# Altium PCB LatchSR-D.PcbDoc
Units mm, origin at the board's own origin, x right, y up, seen from the top; angles counter-clockwise.
Board outline 100 x 50 mm, 2 copper layers (Top Layer, Bottom Layer); 13 components, 17 nets, 72 pads, 0 vias.
Unrouted connection lines stored in the file: 39.
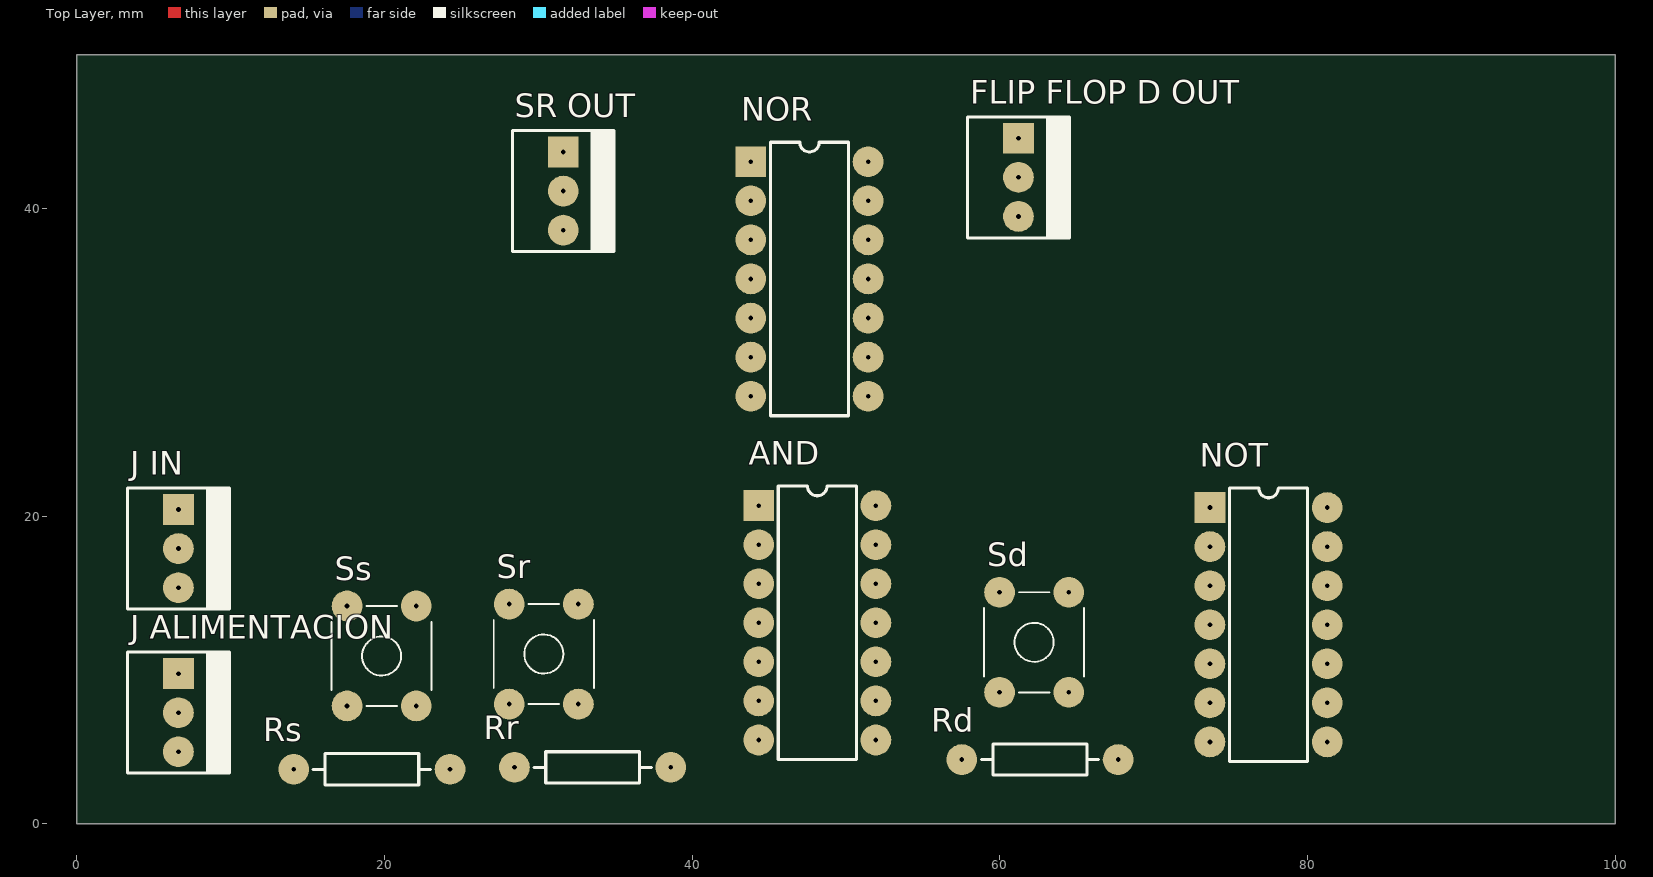
[diagram p0: Top Layer view]
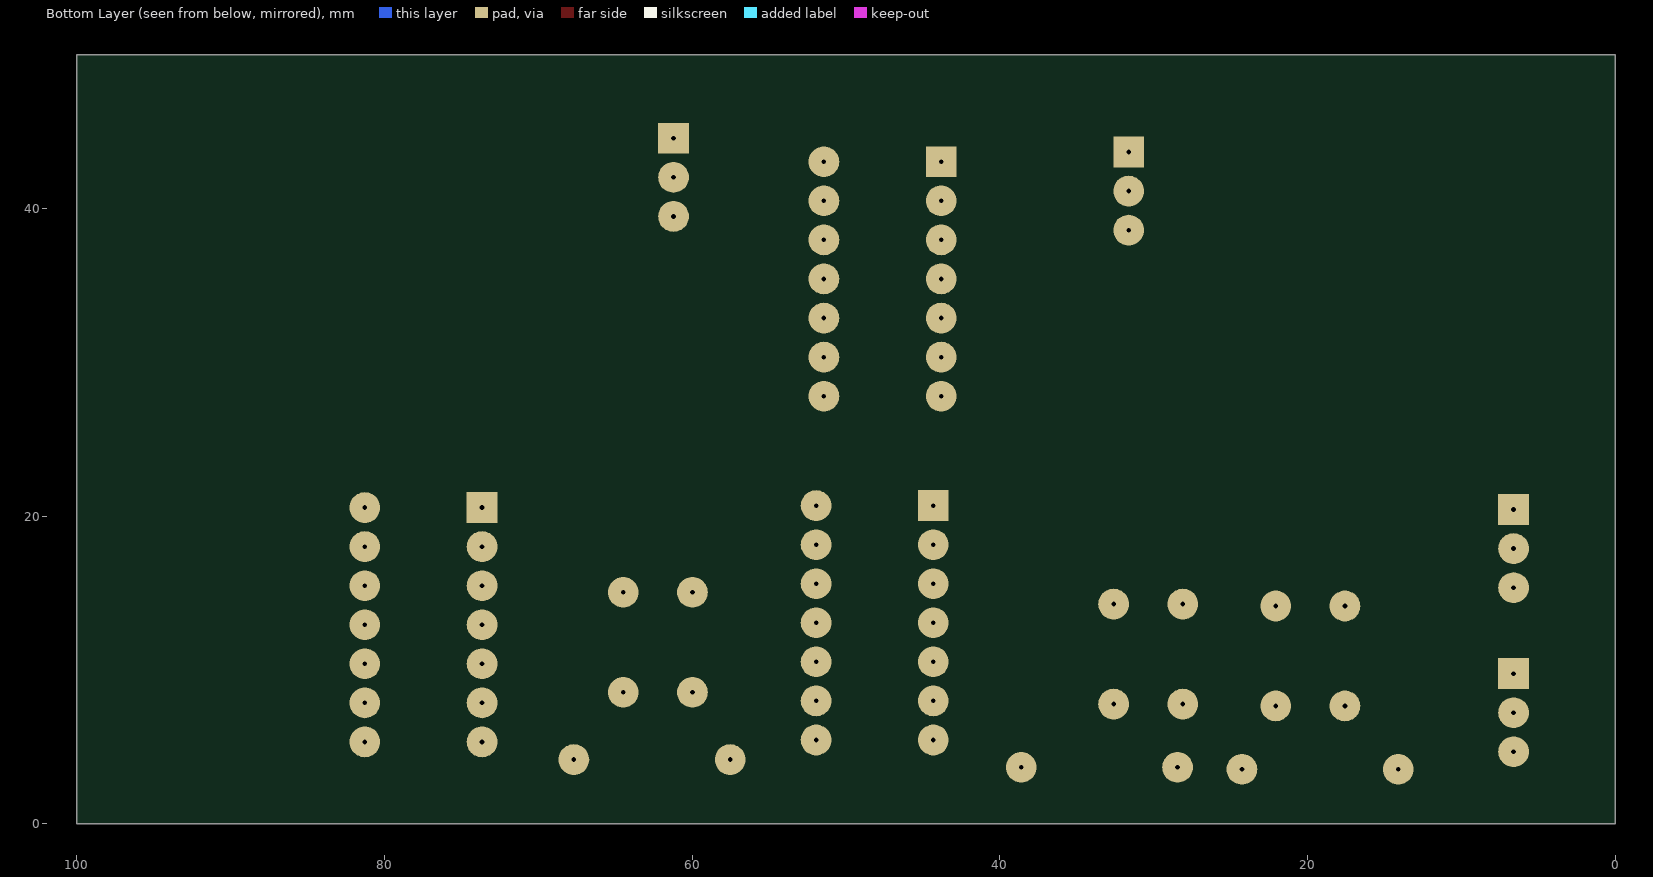
[diagram p1: Bottom Layer view, seen from below]

## Layer stack, top to bottom
Top Solder: solder mask 0.0102, Solder Resist, Dk 3.5
Top Layer: signal copper 0.0356
Dielectric 1: dielectric 0.32, FR-4, Dk 4.8
Bottom Layer: signal copper 0.0356
Bottom Solder: solder mask 0.0102, Solder Resist, Dk 3.5

## Board outline
0,0 100,0 100,50 0,50

## Design rules (kind name [scope] priority, off if disabled: settings)
Clearance [All] p1: gap=0.254 ignorepadtopadclearanceinfootprint=FALSE except(0: Arc-Hole Track-Hole SMDPad-Hole THPad-Hole Via-Hole Fill-Hole Poly-Hole Region-Hole Text-Hole)
PolygonConnect [All] p1: connectstyle=Relief reliefconductorwidth=0.254 reliefentries=4 polygonreliefangle="90 Angle" airgapwidth=0.254
RoutingVias [All] p1: holewidth=0.711 width=1.27 viastyle="Through Hole" minholewidth=0.711 minwidth=1.27 maxholewidth=0.711 maxwidth=1.27
SolderMaskExpansion [All] p1: expansion=0.102
Width [All] p1: maxlimit=0.254 minlimit=0.254 preferedwidth=0.254
30 further rules are at their usual default settings.

## Components (designator, comment, footprint, x,y, rotation, side; value= is the part's Value field where it differs from the comment)
AND "HC08" DIP14 44.323,20.701 r0 top
"FLIP FLOP D OUT" "MOLEX3" MOLEX3 61.214,44.577 r270 top
"J ALIMENTACION" "MOLEX3" MOLEX3 6.604,9.779 r270 top
"J IN" "MOLEX3" MOLEX3 6.604,20.447 r270 top
NOR "HC02" DIP14 43.815,43.053 r0 top
NOT "HC04" DIP14 73.66,20.574 r0 top
Rd "RES" RES400 57.531,4.191 r0 top
Rr "RES" RES400 28.448,3.683 r0 top
Rs "RES" RES400 14.097,3.556 r0 top
Sd "TACT SWITCH" TACTSWITCH 62.23,11.811 r0 top
Sr "TACT SWITCH" TACTSWITCH 30.353,11.049 r0 top
"SR OUT" "MOLEX3" MOLEX3 31.623,43.688 r270 top
Ss "TACT SWITCH" TACTSWITCH 19.812,10.922 r0 top

## Footprints (in the part's own frame and the unit in brackets; to place one, negate y for a bottom-side part, rotate by r counter-clockwise, add the part's x,y. Pads: shape width x height; smd on the part's side, far side on the other; paste and mask are expansions set on the pad)
DIP14 [mm]
  rect 2x2 hole 0.3: 1(0,0)
  round 2 hole 0.3: 2(0,-2.54) 3(0,-5.08) 4(0,-7.62) 5(0,-10.16) 6(0,-12.7) 7(0,-15.24) 8(7.62,-15.24) 9(7.62,-12.7) 10(7.62,-10.16) 11(7.62,-7.62) 12(7.62,-5.08) 13(7.62,-2.54) 14(7.62,0)
  silkscreen extent 1.27,-16.51 6.35,1.27, body extent -0.13,-17.14 7.75,1.9, height 4.19
MOLEX3 [mm]
  rect 2x2 hole 0.3: 1(0,0)
  round 2 hole 0.3: 2(2.54,0) 3(5.08,0)
  silkscreen extent -1.4,-3.3 6.48,3.3, body extent -1.27,-3.18 6.35,3.18, height 10.74
RES400 [mm]
  round 2 hole 0.3: 1(0,0) 2(10.16,0)
  silkscreen extent 1.27,-1.02 8.89,1.02, body extent -0.3,-1.14 10.46,1.17, height 2.43
TACTSWITCH [mm]
  round 2 hole 0.3: 1(-2.25,-3.25) 2(-2.25,3.25) 3(2.25,-3.25) 4(2.25,3.25)
  silkscreen extent -3.25,-3.25 3.25,3.25, body extent -3.05,-3.95 3.15,3.95, height 7

## Part data
AND NOR NOT: library part IC_DIP14

## Nets (pads, with @x,y where several pads share a name; then routed paths per layer and width w, separated by ;. In a path a pad name is that pad's centre, name@x,y a point inside that pad or via, vN(x,y) a via of type N, cw(c..) or ccw(c..) an arc to the next point about the centre after c; other vN are vias at no path point)
+VCC: "J ALIMENTACION.1" AND.14 NOR.14 NOT.14
CLK: "J IN.1" AND.10 AND.13
D: AND.12 NOT.5 Rd.2 Sd.4
DxClk: AND.11 NOR.9
E: "J IN.2" AND.1 AND.4
GND: "FLIP FLOP D OUT.3" "J ALIMENTACION.3" "J IN.3" "SR OUT.3" AND.7 NOR.7 NOT.7 Rd.1 Rr.1 Rs.1
nD: AND.9 NOT.6
nDxClk: AND.8 NOR.12
nQd: "FLIP FLOP D OUT.2" NOR.10 NOR.11
nQrs: "SR OUT.2" NOR.3 NOR.4
Qd: "FLIP FLOP D OUT.1" NOR.8 NOR.13
Qrs: "SR OUT.1" NOR.1 NOR.6
R: AND.5 Rr.2 Sr.4
RxE: AND.6 NOR.2
S: AND.2 Rs.2 Ss.4
SxE: AND.3 NOR.5
Vin: "J ALIMENTACION.2" Sd.2 Sr.2 Ss.2
pads on no net: NOT.1 NOT.2 NOT.3 NOT.4 NOT.8 NOT.9 NOT.10 NOT.11 NOT.12 NOT.13 Sd.1 Sd.3 Sr.1 Sr.3 Ss.1 Ss.3